# EAGLE board untitled (EAGLE 9.6.2)
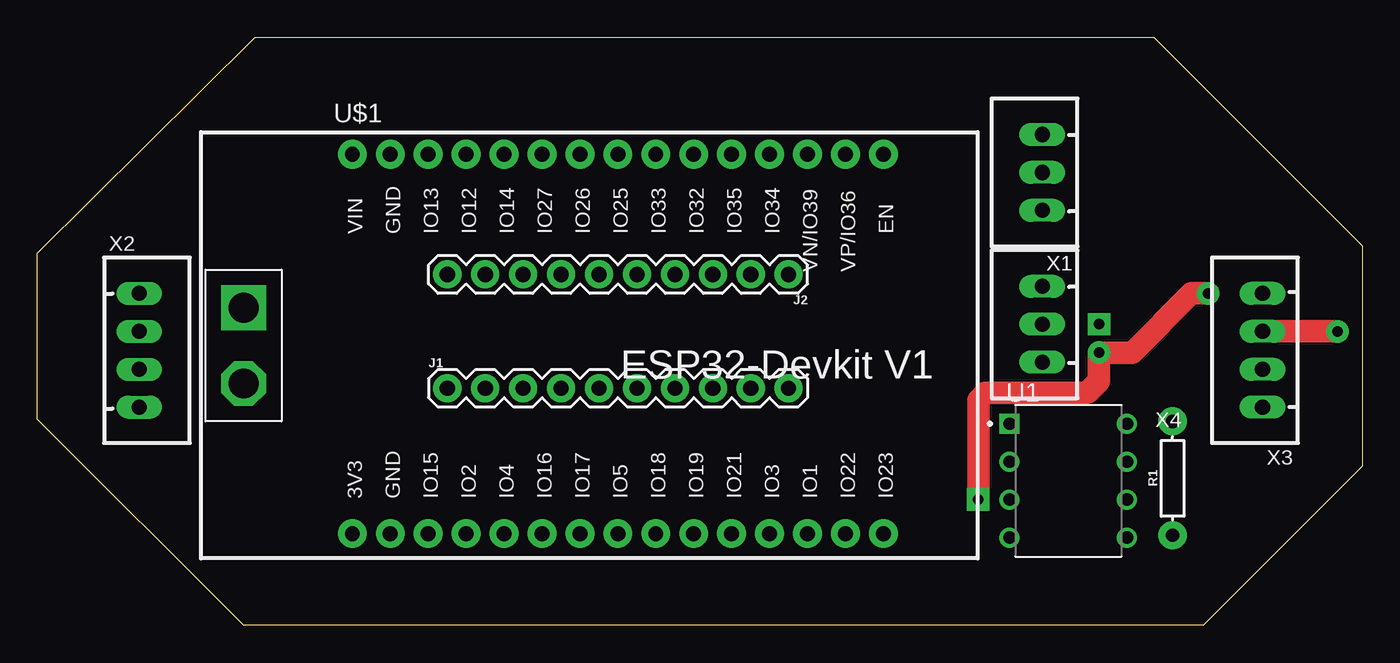
[diagram p0: board, top side]
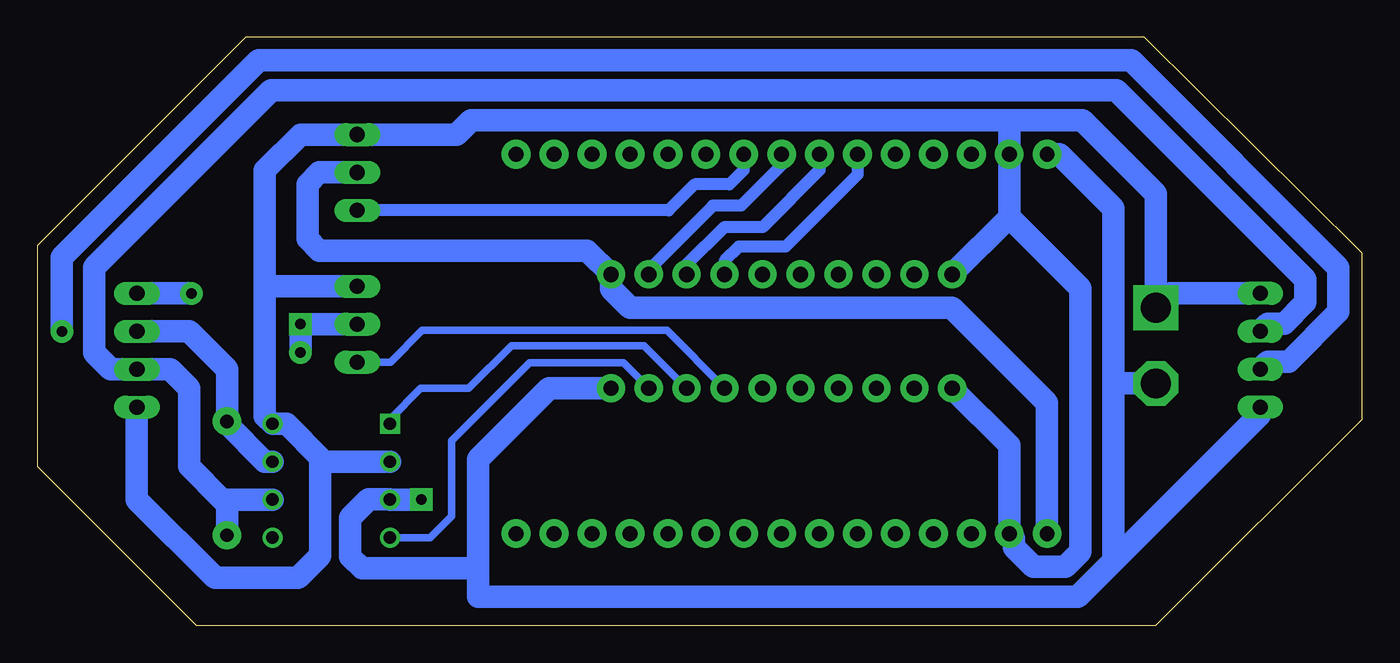
[diagram p1: board, bottom side, seen from below]

Size 88.74 x 39.37 mm. Coordinates in mm from the lower left corner, seen from the top.
Outline: 0,13.81 0,24.92 14.61,39.37 74.77,39.37 88.74,25.4 88.74,10.64 78.11,0 13.81,0 0,13.81
Copper layers (1*16): Top 0.035mm / dielectric 1.5mm / Bottom 0.035mm
Design rules "default *": minimum track width 6mil, minimum drill 0.35mm, track to track 0.51mm, track to pad 0.51mm, pad to pad 0.51mm, via to via 0.51mm, smd to smd 6mil, copper to edge 0.5mm, drill to drill 0.5mm, minimum pad ring 10mil, minimum via ring 8mil, stop-mask expansion 4mil, vias tented up to drill 0.012953125mm, thermal gap 10mil

## Footprints (pad centres in the part's own frame; a part is rotated, then mirrored left to right if it is on the bottom)
1X10 = drill 1.016 pad 1.88: 1 0,0; 2 2.54,0; 3 5.08,0; 4 7.62,0; 5 10.16,0; 6 12.7,0; 7 15.24,0; 8 17.78,0; 9 20.32,0; 10 22.86,0
AXIAL-0.3 = drill 0.9 pad 1.88: P$1 -3.81,0; P$2 3.81,0
DIP787W45P254L1016H533Q8 = drill 0.83 square: 1 -3.937,3.81 | drill 0.83: 2 -3.937,1.27; 3 -3.937,-1.27; 4 -3.937,-3.81; 5 3.937,-3.81; 6 3.937,-1.27; 7 3.937,1.27; 8 3.937,3.81
ESP32-DEVKITV1 = drill 1 pad 1.93: 3V3 -16.52,-12.27; D1 13.96,-12.27; D2 -8.9,-12.27; D3 11.42,-12.27; D4 -6.36,-12.27; D5 1.26,-12.27; D12 -8.9,13.135; D13 -11.44,13.135; D14 -6.36,13.135; D15 -11.44,-12.27; D16 -3.82,-12.27; D17 -1.28,-12.27; D18 3.8,-12.27; D19 6.34,-12.27; D21 8.88,-12.27; D22 16.5,-12.27; D23 19.04,-12.27; D25 1.26,13.135; D26 -1.28,13.135; D27 -3.82,13.135; D32 6.34,13.135; D33 3.8,13.135; D34 11.42,13.135; D35 8.88,13.135; D36 16.5,13.135; D39 13.96,13.135; EN 19.04,13.135; GND@1 -13.98,13.135; GND@2 -13.98,-12.27; VIN -16.52,13.135
BAT = drill 2 octagon: + 2.54,0 | drill 2 square: G -2.54,0
JST-XH-03-PACKAGE-LONG-PAD = drill 1.016 long: 1 -2.54,0; 2 0,0; 3 2.54,0
JST-XH-04-PACKAGE-LONG-PAD = drill 1.016 long: 1 -3.81,0; 2 -1.27,0; 3 1.27,0; 4 3.81,0

## Placement (x,y rotation side)
J1  [1X10]  27.46,15.88 0 top
J2  [1X10]  50.32,23.5 180 top
R1  120Ω  [AXIAL-0.3]  76.04,9.84 90 top
U1  MCP2562-E/P  [DIP787W45P254L1016H533Q8]  69.06,9.68 0 top
U$1  ESP32DEVKITV1  [ESP32-DEVKITV1]  37.62,18.41 0 top
U$2  BAT  [BAT]  13.81,18.73 270 top
X1  JST-XH-03-PIN-LONG-PAD  [JST-XH-03-PACKAGE-LONG-PAD]  67.31,30.32 90 top
X2  JST-XH-04-PIN-LONG-PAD  [JST-XH-04-PACKAGE-LONG-PAD]  6.83,18.41 270 top
X3  JST-XH-04-PIN-LONG-PAD  [JST-XH-04-PACKAGE-LONG-PAD]  82.07,18.41 90 top
X4  JST-XH-03-PIN-LONG-PAD  [JST-XH-03-PACKAGE-LONG-PAD]  67.31,20.16 90 top

## Library data of the parts
J1 J2 = SparkFun-Connectors; PROD_ID: CONN-11563
R1 = SparkFun-Resistors
U1 = MCP2562-E_P; AVAILABILITY: In Stock; DESCRIPTION: 1/1 Transceiver Half CANbus 8-PDIP; MF: Microchip; MP: MCP2562-E/P; PACKAGE: DIP-8 Microchip; PRICE: None; PURCHASE-URL: https://pricing.snapeda.com/search/part/MCP2562-E/P/?ref=eda
U$1 = ESP32-DEVKITV1
U$2 = BAT
X1-X4 = JST XH Connectors

## Nets
1WIRE: U$1.D33 X1.1
3V3: J2.1 U$1.3V3 X1.2
AIN: J2.4 U$1.D27
AIN_5V: J1.7 X4.1
CAN_RX: J2.2 U$1.D25
CAN_RX_5V: J1.9 U1.4
CAN_TX: J2.3 U$1.D26
CAN_TX_5V: J1.8 U1.1
CANH: R1.P$2 U1.7 X2.3 X3.3
CANL: R1.P$1 U1.6 X2.2 X3.2
GND: J1.1 J2.10 U1.2 U1.8 U$1.GND@1 U$1.GND@2 U$2.G X1.3 X2.1 X3.1 X4.3
N$7: U1.5
VDD_5V: J1.10 U1.3 U$1.VIN U$2.+ X2.4 X3.4 X4.2

## Tracks (layer width: path | path; a pad name or v marks a point on that pad's centre or on a via)
1WIRE
  Bottom 0.8: U$1.D33 41.43,31.54 41.43,30.48 42.39,29.53 44.72,29.53 46.46,27.78 X1.1
3V3
  Bottom 1.5: U$1.3V3 21.1,14.91 27.46,21.27 49.05,21.27 50.32,22.54 J2.1 51.91,25.08 69.85,25.08 70.64,25.88 70.64,29.53 69.85,30.32 X1.2
AIN
  Bottom 0.8: U$1.D27 33.8,30.17 38.62,25.36 41.75,25.36 42.7,24.41 J2.4
AIN_5V
  Bottom 0.5: J1.7 46.57,19.74 62.97,19.74 65.09,17.62 X4.1
CAN_RX
  Bottom 0.8: J2.2 47.78,23.81 43.5,28.1 41.59,28.1 38.88,30.81 U$1.D25
CAN_RX_5V
  Bottom 0.5: J1.9 49.48,17.57 55.77,17.57 60.99,12.35 60.99,7.3 62.42,5.87 U1.4
CAN_TX
  Bottom 0.8: J2.3 45.24,24.13 42.7,26.67 40.16,26.67 36.34,30.49 U$1.D26
CAN_TX_5V
  Bottom 0.5: J1.8 48.1,18.73 56.99,18.73 59.85,15.88 63.06,15.88 65.12,13.81 U1.1
CANH  (via drill 0.7 pad 1.5)
  Top 1.5: v87.1,19.68 X3.3
  Bottom 1.5: U1.7 73.5,10.95 76.04,13.49 R1.P$2 76.04,17.14 78.58,19.68 X3.3 | X2.3 6.31,17.66 4.92,17.66 1.59,21 1.59,23.96 15.46,37.83 73.91,37.83 87.1,24.64 v87.1,19.68
CANL
  Bottom 1.5: U1.6 75.88,8.41 | 75.88,8.41 76.36,8.41 78.58,10.64 78.58,15.88 79.85,17.14 X3.2 83.82,17.14 84.93,18.26 84.93,23.97 73.08,35.82 16.46,35.82 3.81,23.18 3.81,21.62 5.23,20.2 6.31,20.2 X2.2 | 75.88,8.41 76.04,8.26 R1.P$1
GND
  Bottom 1: 69.69,10.95 69.8,10.95
  Bottom 1.5: J1.1 23.64,12.05 U$1.GND@2 23.33,5.83 23.33,5.22 22.02,3.92 19.88,3.92 18.88,4.92 18.88,7.07 18.89,7.08 18.89,22.56 23.64,27.32 | 23.64,27.32 U$1.GND@1 23.64,33.81 | 23.64,27.32 J2.10 | 69.8,10.95 69.8,4.66 71.28,3.17 76.83,3.17 82.07,8.41 X3.1 | U1.2 69.69,10.95 69.69,11.13 72.06,13.49 U1.8 73.5,14 73.5,22.7 | 73.5,22.7 73.5,30.48 71.12,32.86 X1.3 60.64,32.86 59.69,33.81 23.64,33.81 | X2.1 12.86,22.23 U$2.G 13.81,28.89 18.73,33.81 23.64,33.81 | X4.3 73.5,22.7
VDD_5V  (via drill 0.7 pad 1.5)
  Top 1.5: v63.02,8.41 63.02,15.08 63.5,15.56 70.33,15.56 71.12,16.35 v71.12,18.26 73.34,18.26 77.31,22.23 v78.42,22.23
  Bottom 1.5: U$1.VIN 20.28,31.55 16.67,27.94 16.67,16.19 | 59.21,3.81 59.21,1.91 19.05,1.91 16.51,4.45 | 59.21,3.81 59.21,11.11 54.45,15.88 J1.10 | 59.21,3.81 66.99,3.81 67.79,4.6 67.79,7.21 66.55,8.44 65.14,8.44 U1.3 v63.02,8.41 | X4.2 v71.12,20.16 v71.12,18.26 | U$2.+ 16.67,16.19 | v78.42,22.23 X3.4 | X2.4 6.83,14.13 16.51,4.45 | 16.67,16.19 16.67,4.6 16.51,4.45